# Altium PCB PLIS_EPM240T100C5N.PcbDoc
Units mm, origin at the board's own origin, x right, y up, seen from the top; angles counter-clockwise.
Board outline 58.18 x 48.08 mm, 2 copper layers (Top Layer, Bottom Layer); 21 components, 85 nets, 242 pads, 56 vias.
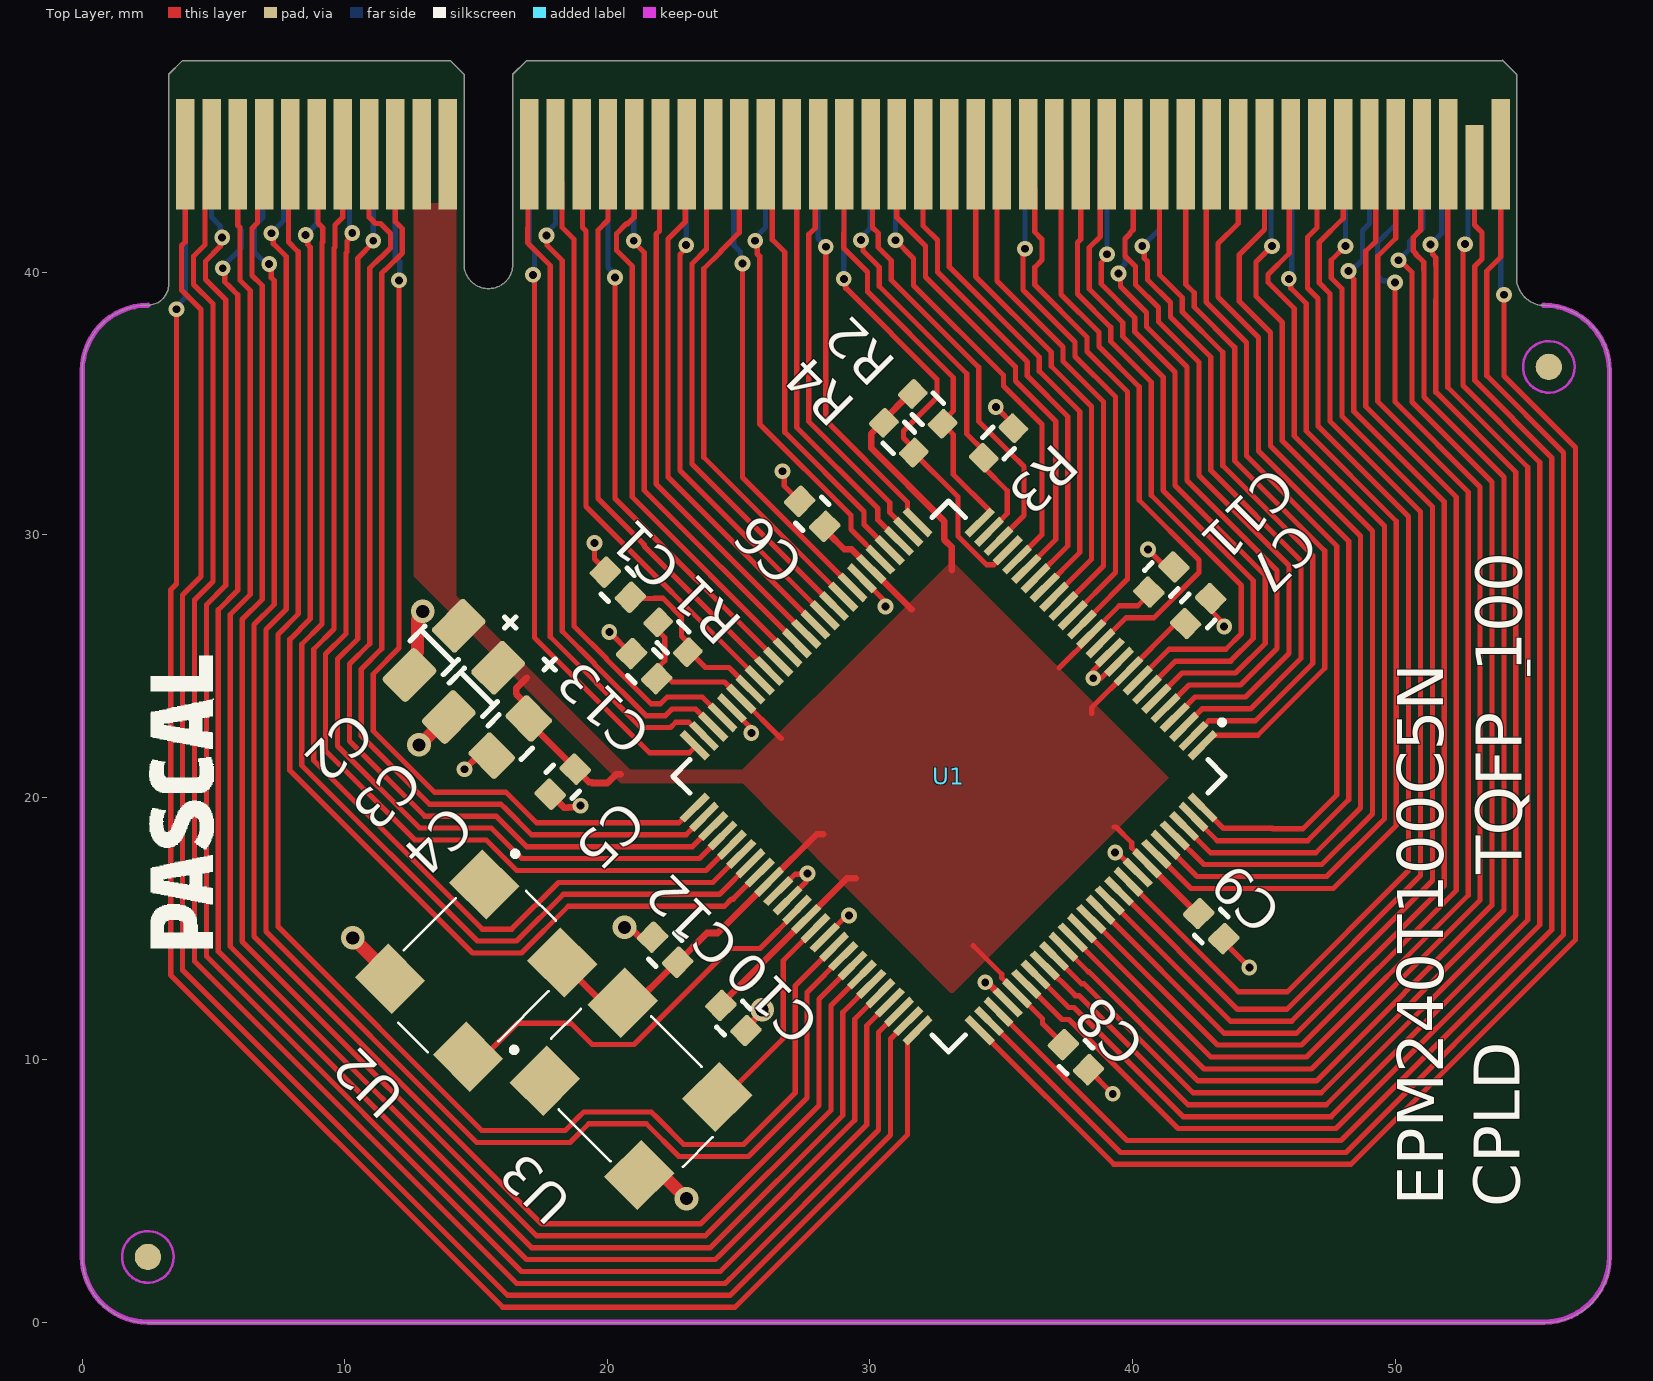
[diagram p0: Top Layer view]
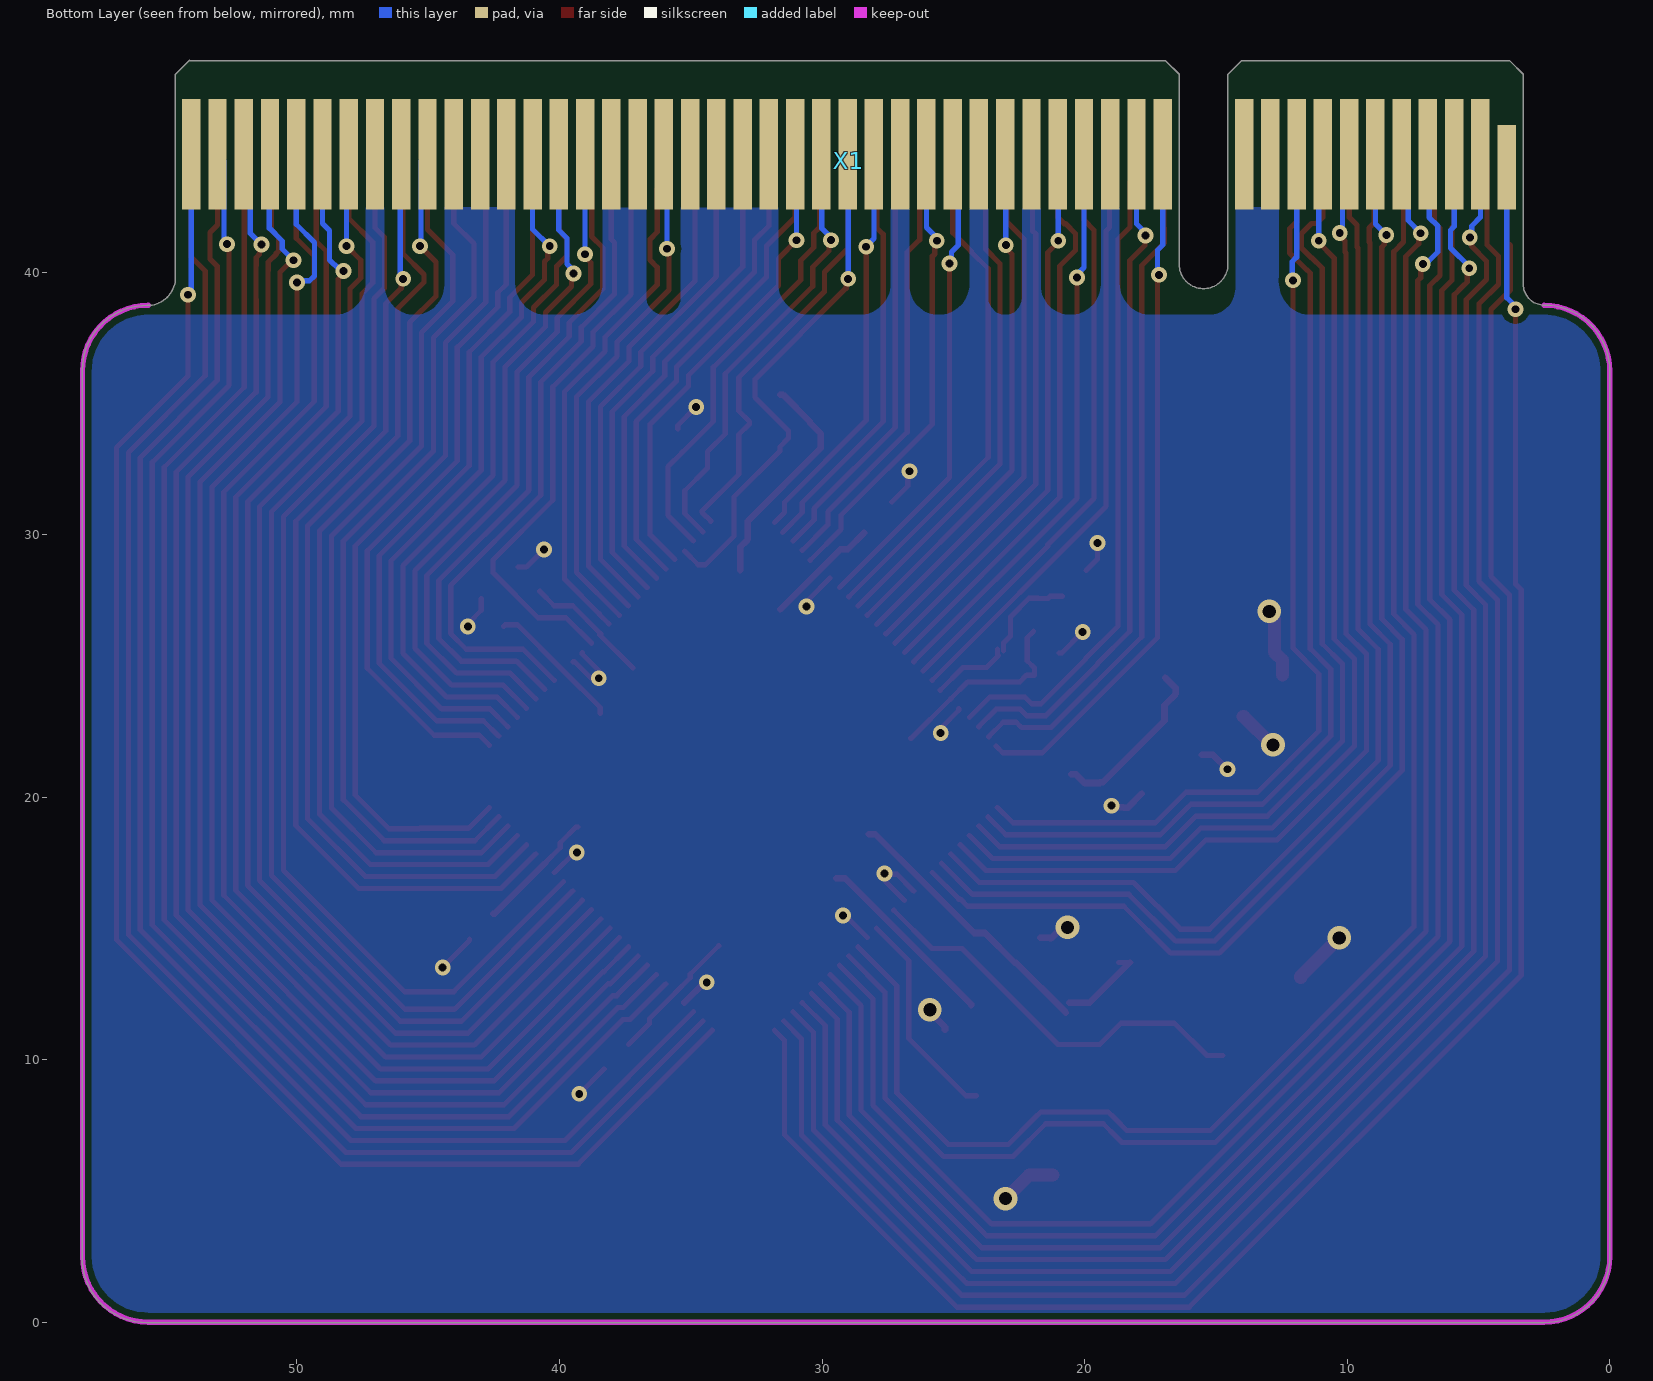
[diagram p1: Bottom Layer view, seen from below]
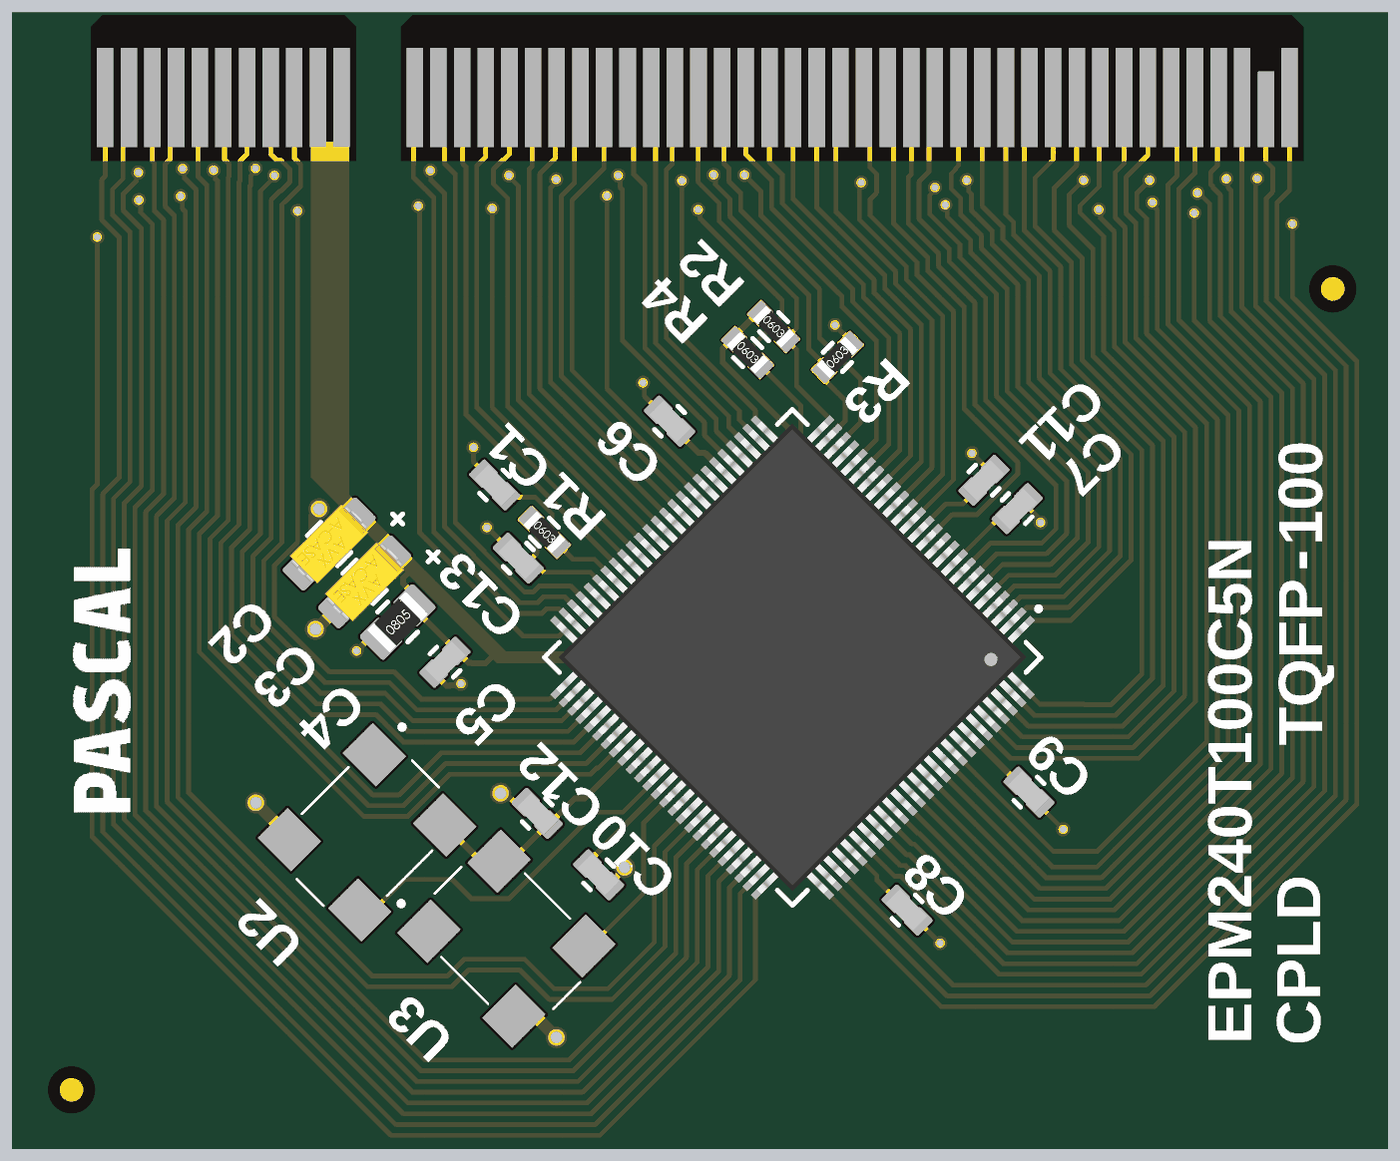
[diagram p2: 3D render of the assembled board from above, using the file's embedded part models]

## Layer stack, top to bottom
Top Solder: solder mask 0.0102, Solder Resist, Dk 3.5
Top Layer: signal copper 0.0356
Dielectric 1: dielectric 0.32, FR-4, Dk 4.8
Bottom Layer: signal copper 0.0356
Bottom Solder: solder mask 0.0102, Solder Resist, Dk 3.5

## Board outline
58.174,2.591 58.174,36.288 ccw(c55.713,36.274) 55.699,38.735 cw(c55.7,39.809) 54.625,39.809 54.625,40.05 54.625,47.542 54.092,48.075 54.067,48.05 16.906,48.05 16.398,47.542 16.398,40.303 cw(c15.471,40.303) 14.544,40.303 14.544,47.542 14.036,48.05 3.8,48.05 3.292,47.542 3.292,39.542 cw(c2.5,39.542) 2.5,38.75 ccw(c2.5,36.25) 0,36.25 0,2.5 ccw(c2.5,2.5) 2.5,0 55.728,0 ccw(c55.728,2.449) 58.176,2.449

## Design rules (kind name [scope] priority, off if disabled: settings)
BoardOutlineClearance [All] p1: gap=0.25 ignorepadtopadclearanceinfootprint=FALSE
Clearance Clearance_1 [All] p1: gap=0.254 ignorepadtopadclearanceinfootprint=FALSE except(0: Arc-Hole Track-Hole SMDPad-Hole THPad-Hole Via-Hole Fill-Hole Poly-Hole Region-Hole Text-Hole)
Clearance [All] p2: gap=0.2 ignorepadtopadclearanceinfootprint=FALSE
ComponentClearance [All] p1 off: gap=0.254 collisioncheckmode=3 verticalgap=0.254 showdistances=FALSE
Height [All] p1 off: minheight=0 maxheight=25.4 prefheight=12.7
PolygonConnect [All] p1: connectstyle=Direct reliefconductorwidth=0.254 reliefentries=4 polygonreliefangle="90 Angle" airgapwidth=0.254
RoutingVias [All] p1: holewidth=0.5 width=0.9 viastyle="Through Hole" minholewidth=0.3 minwidth=0.6 maxholewidth=0.711 maxwidth=1.27
SolderMaskExpansion [All] p1: expansion=-0.8 istentingtop=FALSE soldermaskfromhole=TRUE
Width [All] p1: maxlimit=0.5 minlimit=0.2 preferedwidth=0.25 minimp=50.000000 maximp=50.000000 favimp=50.000000
28 further rules are at their usual default settings.

## Classes and differential pairs
component class EPM240T100C5N_2: X1

## Components (designator, comment, footprint, x,y, rotation, side; value= is the part's Value field where it differs from the comment)
C1 "0603" K10-79_1.6_0.8(0603) 20.4,28.1 r315 top value=104
C2 "A-case" K53-68_3216(A) 13.4,25.6 r225 top value="100 мк"
C3 "A-case" K53-68_3216(A) 14.9,24 r225 top value="10 мк"
C4 "0603" K10-79_2.0_1.25(0805) 16.3,22.3 r45 top value="1 мк"
C5 "0603" K10-79_1.6_0.8(0603) 18.3,20.6 r45 top value="0,1 мк"
C6 "0603" K10-79_1.6_0.8(0603) 27.8,30.8 r315 top value="0,01 мк"
C7 "0603" K10-79_1.6_0.8(0603) 42.5,27.1 r225 top value="0,01 мк"
C8 "0603" K10-79_1.6_0.8(0603) 37.846,10.109 r135 top value="0,01 мк"
C9 "0603" K10-79_1.6_0.8(0603) 43,15.1 r135 top value="0,01 мк"
C10 "0603" K10-79_1.6_0.8(0603) 24.8,11.6 r135 top value="0,01 мк"
C11 "0603" K10-79_1.6_0.8(0603) 41.1,28.3 r225 top value="0,01 мк"
C12 "0603" K10-79_1.6_0.8(0603) 22.2,14.2 r315 top value="0,01 мк"
C13 "0603" K10-79_1.6_0.8(0603) 21.4,25 r315 top value="0,01 мк"
R1 "10 кОм ±* *, *" "RES 0603" 22.5,26.1 r315 top value="10 к"
R2 "10 кОм ±* *, *" "RES 0603" 32.2,34.8 r315 top value="10 к"
R3 "10 кОм ±* *, *" "RES 0603" 34.9,33.5 r45 top value="10 к"
R4 "10 кОм ±* *, *" "RES 0603" 31.1,33.7 r315 top value="10 к"
U1 "EPM240T100C5N" 100-TQFP_ALR 33,20.8 r225 top
U2 "генератор" CB3LV3C50M0000 15,13.4 r225 top value="32.768 кГц"
U3 "генератор" CB3LV3C50M0000 20.9,8.9 r315 top value="50 МГц"
X1 "KONT_POLE_MEZ" 3113-112t_otv 30.025,44 r180 bottom

## Footprints (in the part's own frame and the unit in brackets; to place one, negate y for a bottom-side part, rotate by r counter-clockwise, add the part's x,y. Pads: shape width x height; smd on the part's side, far side on the other; paste and mask are expansions set on the pad)
100-TQFP_ALR [mil]
  rect 53.5x11 smd paste+0 mask+0: 1(-302.25,236.22) 2(-302.25,216.54) 3(-302.25,196.85) 4(-302.25,177.17) 5(-302.25,157.48) 6(-302.25,137.8) 7(-302.25,118.11) 8(-302.25,98.43) 9(-302.25,78.74) 10(-302.25,59.06) 11(-302.25,39.37) 12(-302.25,19.69) 13(-302.25,0) 14(-302.25,-19.69) 15(-302.25,-39.37) 16(-302.25,-59.06) 17(-302.25,-78.74) 18(-302.25,-98.43) 19(-302.25,-118.11) 20(-302.25,-137.8) 21(-302.25,-157.48) 22(-302.25,-177.17) 23(-302.25,-196.85) 24(-302.25,-216.54) 25(-302.25,-236.22) 51(302.25,-236.22) 52(302.25,-216.54) 53(302.25,-196.85) 54(302.25,-177.17) 55(302.25,-157.48) 56(302.25,-137.8) 57(302.25,-118.11) 58(302.25,-98.43) 59(302.25,-78.74) 60(302.25,-59.06) 61(302.25,-39.37) 62(302.25,-19.69) 63(302.25,0) 64(302.25,19.69) 65(302.25,39.37) 66(302.25,59.06) 67(302.25,78.74) 68(302.25,98.43) 69(302.25,118.11) 70(302.25,137.8) 71(302.25,157.48) 72(302.25,177.17) 73(302.25,196.85) 74(302.25,216.54) 75(302.25,236.22)
  rect 11x53.5 smd paste+0 mask+0: 26(-236.22,-302.25) 27(-216.54,-302.25) 28(-196.85,-302.25) 29(-177.17,-302.25) 30(-157.48,-302.25) 31(-137.8,-302.25) 32(-118.11,-302.25) 33(-98.43,-302.25) 34(-78.74,-302.25) 35(-59.06,-302.25) 36(-39.37,-302.25) 37(-19.69,-302.25) 38(0,-302.25) 39(19.69,-302.25) 40(39.37,-302.25) 41(59.06,-302.25) 42(78.74,-302.25) 43(98.43,-302.25) 44(118.11,-302.25) 45(137.8,-302.25) 46(157.48,-302.25) 47(177.17,-302.25) 48(196.85,-302.25) 49(216.54,-302.25) 50(236.22,-302.25) 76(236.22,302.25) 77(216.54,302.25) 78(196.85,302.25) 79(177.17,302.25) 80(157.48,302.25) 81(137.8,302.25) 82(118.11,302.25) 83(98.43,302.25) 84(78.74,302.25) 85(59.06,302.25) 86(39.37,302.25) 87(19.69,302.25) 88(0,302.25) 89(-19.69,302.25) 90(-39.37,302.25) 91(-59.06,302.25) 92(-78.74,302.25) 93(-98.43,302.25) 94(-118.11,302.25) 95(-137.8,302.25) 96(-157.48,302.25) 97(-177.17,302.25) 98(-196.85,302.25) 99(-216.54,302.25) 100(-236.22,302.25)
  body extent -315,-315 315,315, height 47
3113-112t_otv [mm]
  rect 0.7x3.2 smd: A1(26.1,0)
  rect 0.7x4.2 smd: A2(25.1,0.5) A3(24.1,0.5) A4(23.1,0.5) A5(22.1,0.5) A6(21.1,0.5) A7(20.1,0.5) A8(19.1,0.5) A9(18.1,0.5) A10(17.1,0.5) A11(16.1,0.5) A12(13,0.5) A13(12,0.5) A14(11,0.5) A15(10,0.5) A16(9,0.5) A17(8,0.5) A18(7,0.5) A19(6,0.5) A20(5,0.5) A21(4,0.5) A22(3,0.5) A23(2,0.5) A24(1,0.5) A25(0,0.5) A26(-1,0.5) A27(-2,0.5) A28(-3,0.5) A29(-4,0.5) A30(-5,0.5) A31(-6,0.5) A32(-7,0.5) A33(-8,0.5) A34(-9,0.5) A35(-10,0.5) A36(-11,0.5) A37(-12,0.5) A38(-13,0.5) A39(-14,0.5) A40(-15,0.5) A41(-16,0.5) A42(-17,0.5) A43(-18,0.5) A44(-19,0.5) A45(-20,0.5) A46(-21,0.5) A47(-22,0.5) A48(-23,0.5) A49(-24,0.5)
  rect 0.7x4.2 smd far side: B1(26.1,0.5) B2(25.1,0.5) B3(24.1,0.5) B4(23.1,0.5) B5(22.1,0.5) B6(21.1,0.5) B7(20.1,0.5) B8(19.1,0.5) B9(18.1,0.5) B10(17.1,0.5) B11(16.1,0.5) B12(13,0.5) B13(12,0.5) B14(11,0.5) B15(10,0.5) B16(9,0.5) B17(8,0.5) B18(7,0.5) B19(6,0.5) B20(5,0.5) B21(4,0.5) B22(3,0.5) B23(2,0.5) B24(1,0.5) B25(0,0.5) B26(-1,0.5) B27(-2,0.5) B28(-3,0.5) B29(-4,0.5) B30(-5,0.5) B31(-6,0.5) B32(-7,0.5) B33(-8,0.5) B34(-9,0.5) B35(-10,0.5) B36(-11,0.5) B37(-12,0.5) B38(-13,0.5) B39(-14,0.5) B40(-15,0.5) B41(-16,0.5) B42(-17,0.5) B43(-18,0.5) B44(-19,0.5) B45(-20,0.5) B46(-21,0.5) B47(-22,0.5) B49(-24,0.5)
  rect 0.7x3.2 smd far side: B48(-23,0)
CB3LV3C50M0000 [mm]
  rect 1.8x2 smd mask+0.102: 1(-2.54,-2.1) 2(2.54,-2.1) 3(2.54,2.1) 4(-2.54,2.1)
  silkscreen extent -4.3,-2.5 3.5,2.5
K10-79_1.6_0.8(0603) [mm]
  rrect20% 0.85x0.95 smd mask+0.1: 1(-0.675,0) 2(0.675,0)
  silkscreen extent -0.2,-0.7 0.2,0.7, body extent -0.8,-0.42 0.84,0.43, height 0.41
K10-79_2.0_1.25(0805) [mm]
  rrect20% 1.2x1.45 smd mask+0.1: 1(-1,0) 2(1,0)
  silkscreen extent -0.3,-0.9 0.3,0.9, body extent -1.15,-0.67 1.15,0.68, height 0.76
K53-68_3216(A) [mm] "Molded Capacitor, 2-Leads, Body 3,20x1,60mm, IPC Medium Density"
  rrect20% 1.75x1.3 smd mask+0.1: 1(-1.325,0) 2(1.325,0)
  silkscreen extent -3.1,-0.9 0.4,1.6, body extent -1.7,-0.84 1.7,0.84, height 1.71
"RES 0603" [mm]
  rrect20% 0.8x0.9 smd paste-0.025 mask+0.05: 1(-0.8,0) 2(0.8,0)
  silkscreen extent -0.28,-0.57 0.28,0.57, body extent -0.85,-0.4 0.85,0.4, height 0.56

## Part data
C1 C4 C5 C6 C7 C8 C9 C10 C11 C12 C13: library part C, Package=0603
C2 C3: library part C+, Package=A-case
R1 R2 R3 R4: library part R_1
U2 U3: Package=0705, PartNumber=MQ-12.000-18, Company=Mercury
X1: library part 3113-112T

## Free pads (board coordinates)
  round 1 smd paste-1 mask+0.5: 1(2.5,2.5) 1(55.855,36.398)

## Via types
v1: diameter 0.6, hole 0.3, Top Layer to Bottom Layer, 50 vias
v2: diameter 0.9, hole 0.5, Top Layer to Bottom Layer, 6 vias

## Nets (pads, with @x,y where several pads share a name; then routed paths per layer and width w, separated by ;. In a path a pad name is that pad's centre, name@x,y a point inside that pad or via, vN(x,y) a via of type N, cw(c..) or ccw(c..) an arc to the next point about the centre after c; other vN are vias at no path point)
3V3: C2.1 C3.1 C4.2 C5.2 C6.2 C7.2 C8.2 C9.2 C10.2 C11.2 C12.2 C13.2 R1.1 R2.1 R4.1 U1.9 U1.13 U1.31 U1.45 U1.59 U1.63 U1.80 U1.94 U2.4 U3.4 X1.B10 X1.B11 | length 68.1
  Top Layer w0.2: U2.4@18.242,13.708 18.284,13.708 U2.4@18.708,13.708 ; R1.1@21.95,26.325 22.184,26.091 22.184,25.207 21.904,24.927 21.904,24.655 22.215,24.655 22.471,24.4 24.459,24.4 25.101,23.758 26.61,22.249 26.624,22.249 ; 33.934,14.351 35.02,13.265 35.02,13.132 35.6,12.552 U1.80 36.572,11.571 36.572,11.383 C8.2 ; 37.2,24.925 U1.13@38.466,26.191 ; U1.13 39.498,27.298 40.198,27.298 C11.2@40.748,27.848 ; 38.45,23.2 38.45,23.422 U1.9 41.607,26.579 42.067,26.579 C7.2@42.123,26.523 ; 39.3,18.875 39.371,18.875 39.97,18.275 39.97,18.081 40.55,17.502 U1.94
  Top Layer w0.25: 16.925,24.55 16.523,24.148 16.523,23.941 16.957,23.507 16.957,22.918 18.775,21.1 19.3,20.575 19.4,20.575 19.425,20.55 20,20.55 20.325,20.875 20.5,20.875 ; U2.4 18.284,13.708 19.811,12.181 U3.4 ; U3.4@20.711,11.806 22.601,13.696 C12.2@22.651,13.696 ; C12.2@22.651,13.697 C12.2 23.79,14.835 24.207,14.835 U1.59 27.972,18.6 28.225,18.6 ; C10.2 24.323,12.123 27.19,14.99 U1.63 29.125,16.925 29.45,16.925 ; C6.2@28.402,30.073 29.024,29.451 29.298,29.451 U1.31 31.591,27.159 ; R2.1@31.584,35.341 31.491,35.341 30.475,34.325 30.475,34.284 30.048,33.857 30.048,33.302 32.825,30.525 32.825,29.825 33.113,29.538 33.113,28.65 ; U1.94 42.465,15.577 C9.2
G_TCK: R3.1 U1.24 X1.A25 | length 17.1
  Top Layer w0.2: v1(29.661,41.224) 29.737,41.148 29.737,40.82 30.356,40.202 30.356,39.468 33.688,36.137 33.688,33.844 34.359,33.172 34.359,32.55 35.232,31.677 35.232,30.81 U1.24
  Bottom Layer w0.2: v1(29.661,41.224) 29.661,41.326 30.016,41.682 30.016,44.491 X1.A25
G_TDI: U1.23 X1.B25 | length 16.4
  Top Layer w0.2: X1.B25@30.1,43.35 30.1,41.71 30.315,41.495 30.315,40.948 30.81,40.453 30.81,39.712 34.142,36.38 34.142,36.287 34.142,34.565 34.144,34.563 34.144,34.321 35.321,33.144 35.868,32.598 35.868,30.739 U1.23
G_TDO: R2.2 U1.25 X1.B24 | length 16.8
  Top Layer w0.2: X1.B24 29.013,44.488 29.013,41.501 29.007,41.495 29.007,40.953 29.013,40.947 29.013,40.903 29.902,40.014 29.902,39.262 33.172,35.992 33.172,34.723 32.766,34.316 32.766,34.223 33.172,33.817 33.172,32.304 34.568,30.909 34.568,30.854 U1.25@34.236,30.522
G_TMS: R4.2 U1.22 X1.A24 | length 20
  Top Layer w0.2: v1(29.007,39.751) 29.083,39.674 29.083,39.395 32.556,35.922 32.556,35.234 31.275,33.953 31.275,33.687 31.606,33.355 31.606,33.194 33.35,31.45 33.35,29.947 34.437,28.86 34.715,28.86 U1.22@35.24,29.386
  Bottom Layer w0.2: v1(29.007,39.751) 29.007,44.482 X1.A24
GND: C1.1 C2.2 C3.2 C4.1 C5.1 C6.1 C7.1 C8.1 C9.1 C10.1 C11.1 C12.1 C13.1 R3.2 U1.10 U1.11 U1.32 U1.46 U1.60 U1.61 U1.65 U1.79 U1.93 U2.2 U3.2 X1.A10 X1.A11 X1.A14 X1.A17 X1.A19 X1.A22 X1.A27 X1.A28 X1.A29 X1.A30 X1.A32 X1.A33 X1.A37 X1.A38 X1.A39 X1.A42 | length 35.2
  Top Layer w0.2: v1(19.507,29.693) 19.507,29.082 C1.1@19.944,28.645 ; v1(20.075,26.3) 20.873,25.502 C13.1@20.973,25.502 ; U1.46@24.793,23.375 24.793,23.319 25.405,22.707 25.405,22.528 v1(25.482,22.452) ; U1.60 27.151,17.072 v1@27.562,17.072 ; v1(26.674,32.424) 26.738,32.36 26.738,31.862 C6.1@27.345,31.255 ; U1.61 27.551,16.765 27.551,17.026 v1(27.625,17.1) ; U1.65 29.114,15.5 v1(29.2,15.5) ; U1.32 30.523,27.519 30.523,27.342 v1(30.595,27.27) ; v1(34.796,34.867) 35.498,34.164 R3.2@35.498,34.036 ; C8.1@38.298,9.657 v1(39.246,8.709) ; U1.11 39.136,25.465 38.506,24.836 v1(38.506,24.536) 38.802,24.536 39.433,25.168 U1.10 ; v1(39.34,17.906) 39.421,17.906 40.187,17.139 U1.93 ; v1(40.592,29.439) 41.254,28.777 C11.1 ; C7.1 42.977,27.13 43.491,26.617 v1(43.491,26.509) ; C9.1@43.427,14.598 43.427,14.548 v1(44.45,13.525)
  Top Layer w0.25: v1(14.563,21.074) 15.107,21.618 C4.1@15.543,21.618 ; C5.1@17.82,20.145 18.366,19.6 18.502,19.6 18.522,19.62 18.908,19.62 v1(18.975,19.687) ; v2(20.65,15.051) 20.775,14.927 20.978,14.927 21.263,14.642 21.312,14.642 21.321,14.65 C12.1@21.697,14.65 ; C10.1@25.318,11.156 25.318,11.251 25.893,11.826 v2(25.893,11.913) ; v1(34.391,12.956) 34.48,12.956 U1.79
  Top Layer w0.5: v2(10.3,14.65) 11.769,13.181 U2.2@11.769,13.139 ; C2.2 12.463,25.229 12.771,25.536 12.771,26.777 12.971,26.977 v2(12.971,27.085) ; v2(12.825,22) 12.862,22 13.937,23.075 C3.2@13.975,23.075 ; U3.2 22.112,5.619 v2(23.012,4.719)
NetC1_2: C1.2 R1.2 U1.44 | length 6.8
  Top Layer w0.2: C1.2@20.848,27.666 21.306,27.666 21.393,27.579 21.77,27.579 21.775,27.584 22.115,27.584 22.827,26.872 22.827,26.145 23.091,25.882 R1.2@23.091,25.584 ; R1.2@23.276,25.405 23.731,24.95 24.632,24.95 U1.44@25.5,24.082 ; R1.2@23.316,25.359 R1.2@23.316,25.657
NetU1_62: U1.62 U2.3 | length 15.5
  Top Layer w0.2: U2.3@14.739,10.169 15.344,10.169 16.575,11.4 18.61,11.4 19.423,10.587 21.013,10.587 24.676,14.25 25.818,14.25 U1.62@27.268,15.7
NetU1_64: U1.64 U3.3 | length 8.2
  Top Layer w0.2: U3.3@24.131,8.639 24.514,8.639 26.697,10.822 26.697,13.79 U1.64
PIN_1: U1.1 X1.B37 | length 27.6
  Top Layer w0.2: X1.B37 42.025,39.546 42.351,39.219 42.351,38.68 43.891,37.14 43.891,32.823 47.323,29.39 47.323,24.922 44.769,22.368 43.053,22.368 U1.1
PIN_2: U1.2 X1.B36 | length 27.5
  Top Layer w0.2: X1.B36 41.025,39.904 41.897,39.031 41.897,38.492 43.437,36.952 43.437,32.635 46.869,29.202 46.869,26.445 46.869,25.719 46.869,25.415 46.869,25.11 44.678,22.919 44.374,22.919 44.069,22.919 43.344,22.919 42.906,22.919 42.327,22.339 U1.2
PIN_3: U1.3 X1.A36 | length 27.5
  Top Layer w0.2: v1(40.371,40.996) 40.448,40.919 40.448,40.537 40.571,40.413 40.571,39.716 41.443,38.843 41.443,38.304 42.983,36.764 42.983,32.447 46.415,29.014 46.415,26.633 46.415,25.908 46.415,25.603 46.415,25.298 44.49,23.373 44.186,23.373 43.881,23.373 43.156,23.373 42.653,23.373 41.973,22.693 U1.3
  Bottom Layer w0.2: v1@40.383,40.996 41.025,41.638 X1.A36
PIN_4: U1.4 X1.B35 | length 27.1
  Top Layer w0.2: X1.B35 40.025,41.624 39.908,41.507 39.908,41.457 39.717,41.266 39.717,40.625 40.117,40.225 40.117,39.527 40.989,38.655 40.989,38.115 42.529,36.576 42.529,32.259 45.961,28.826 45.961,26.821 45.961,26.096 45.961,25.791 45.961,25.486 44.302,23.827 43.998,23.827 43.693,23.827 42.968,23.827 42.382,23.827 41.611,23.055 U1.4
PIN_5: U1.5 X1.A35 | length 26.8
  Top Layer w0.2: v1(39.463,39.954) 39.54,39.878 39.54,39.463 40.535,38.467 40.535,37.927 42.075,36.388 42.075,32.071 45.507,28.638 45.507,27.009 45.507,26.284 45.507,25.979 45.507,25.674 44.114,24.281 43.81,24.281 43.505,24.281 42.78,24.281 42.147,24.281 41.266,23.4 U1.5
  Bottom Layer w0.2: v1(39.463,39.954) 39.463,40.062 39.717,40.316 39.717,41.297 40.03,41.611 40.03,44.495 X1.A35
PIN_6: U1.6 X1.A34 | length 26.3
  Top Layer w0.2: v1(39.026,40.688) 39.026,40.58 38.809,40.363 38.809,39.551 40.081,38.279 40.081,37.739 41.621,36.2 41.621,31.883 45.053,28.45 45.053,27.197 45.053,26.472 45.053,26.167 45.053,25.862 43.926,24.735 43.621,24.735 43.317,24.735 42.592,24.735 41.885,24.735 U1.6
  Bottom Layer w0.2: X1.A34 39.026,44.499 v1(39.026,40.688)
PIN_7: U1.7 X1.B34 | length 26.2
  Top Layer w0.2: X1.B34 38.775,44.25 38.775,41.362 38.355,40.942 38.355,39.363 39.627,38.091 39.627,37.551 41.167,36.012 41.167,31.695 44.599,28.262 44.599,27.385 44.599,26.66 44.599,26.355 44.599,26.05 43.738,25.189 43.433,25.189 43.129,25.189 42.404,25.189 41.641,25.189 40.559,24.107 U1.7
PIN_8: U1.8 X1.B33 | length 25.6
  Top Layer w0.2: X1.B33 38.025,41.254 37.901,41.13 37.901,39.175 39.173,37.903 39.173,37.363 40.713,35.824 40.713,31.506 44.145,28.074 44.145,26.238 43.55,25.643 41.388,25.643 40.205,24.461 U1.8
PIN_12: U1.12 X1.B32 | length 23.1
  Top Layer w0.2: X1.B32 37.275,44.25 37.275,39.159 38.719,37.715 38.719,37.175 40.259,35.636 40.259,31.318 42.532,29.045 42.532,28.56 40.816,26.844 39.751,26.844 U1.12
PIN_14: U1.14 X1.B31 | length 19.2
  Top Layer w0.2: X1.B31@36.125,43.325 36.275,43.175 36.275,41.536 36.557,41.254 36.557,40.469 36.281,40.193 36.281,39.511 38.265,37.527 38.265,36.987 39.805,35.448 39.805,28.312 38.485,26.992 38.485,26.973 U1.14@38.125,26.613
PIN_15: U1.15 X1.A31 | length 19.8
  Top Layer w0.2: v1(35.903,40.894) 35.827,40.818 35.827,39.323 37.811,37.339 37.811,36.799 39.351,35.26 39.351,28.565 U1.15
  Bottom Layer w0.2: v1(35.903,40.894) 35.903,44.378 X1.A31
PIN_16: U1.16 X1.B30 | length 19.6
  Top Layer w0.2: X1.B30 34.843,44.318 34.843,39.665 37.357,37.151 37.357,36.611 38.897,35.072 38.897,28.818 U1.16
PIN_17: U1.17 X1.B29 | length 18.2
  Top Layer w0.2: X1.B29@34.025,43.447 34.025,39.841 36.903,36.963 36.903,36.423 38.443,34.884 38.443,29.071 U1.17
PIN_18: U1.18 X1.B28 | length 17.8
  Top Layer w0.2: X1.B28@33.025,43.175 33.025,40.199 36.449,36.775 36.449,36.235 37.989,34.696 37.989,29.324 U1.18
PIN_19: U1.19 X1.B27 | length 18
  Top Layer w0.2: X1.B27@32.025,43.6 32.025,41.771 32.571,41.225 32.571,40.011 35.995,36.586 35.995,36.047 37.535,34.508 37.535,29.577 U1.19
PIN_20: U1.20 X1.B26 | length 17.2
  Top Layer w0.2: X1.B26@31.025,42.893 31.025,42.088 32.117,40.996 32.117,39.823 35.541,36.398 35.541,35.859 37.081,34.319 37.081,29.831 U1.20
PIN_21: U1.21 X1.A26 | length 18.2
  Top Layer w0.2: v1(30.969,41.219) 31.663,40.525 31.663,39.501 35.087,36.076 35.087,35.671 36.551,34.208 36.551,30.007 U1.21
  Bottom Layer w0.2: v1(30.969,41.219) 30.969,44.444 X1.A26
PIN_26: U1.26 X1.A23 | length 15.6
  Top Layer w0.2: v1(28.321,40.97) 28.321,34.352 31.432,31.24 31.432,30.853 U1.26
  Bottom Layer w0.2: X1.A23 28.025,41.287 28.321,40.991 v1(28.321,40.97)
PIN_27: U1.27 X1.B23 | length 15.5
  Top Layer w0.2: X1.B23@28.092,43.79 27.915,43.612 27.915,41.692 27.667,41.444 27.667,34.321 30.754,31.234 30.754,30.849 U1.27@31.511,30.093
PIN_28: U1.28 X1.B22 | length 16.4
  Top Layer w0.2: X1.B22 27.213,44.312 27.213,34.094 30.3,31.007 30.3,30.571 U1.28
PIN_29: U1.29 X1.B21 | length 17
  Top Layer w0.2: X1.B21 26.275,44.25 26.275,41.874 26.283,41.867 26.283,41.241 26.759,40.765 26.759,33.906 29.775,30.89 29.775,30.389 U1.29
PIN_30: U1.30 X1.A21 | length 17.6
  Top Layer w0.2: v1(25.629,41.199) 25.705,41.122 25.705,40.701 25.8,40.606 25.8,34.223 29.275,30.748 29.275,30.207 U1.30@30.45,29.032
  Bottom Layer w0.2: v1(25.629,41.199) 25.629,41.307 26.025,41.703 X1.A21
PIN_33: U1.33 X1.A20 | length 18.5
  Top Layer w0.2: v1(25.146,40.335) 25.146,32.19 U1.33
  Bottom Layer w0.2: X1.A20 24.816,44.291 24.816,41.021 25.069,40.767 25.069,40.412 v1(25.146,40.335)
PIN_34: U1.34 X1.B20 | length 19.6
  Top Layer w0.2: X1.B20 25.025,41.509 24.321,40.805 24.321,40.784 23.673,40.136 23.673,32.956 U1.34
PIN_35: U1.35 X1.B19 | length 19.3
  Top Layer w0.2: X1.B19@24.121,43.962 23.775,43.616 23.775,40.881 23.219,40.324 23.219,32.703 U1.35
PIN_36: U1.36 X1.A18 | length 20
  Top Layer w0.2: v1(23.001,41.032) 23.001,40.924 22.765,40.687 22.765,32.449 U1.36
  Bottom Layer w0.2: v1(23.001,41.032) 23.001,44.476 X1.A18
PIN_37: U1.37 X1.B18 | length 20.5
  Top Layer w0.2: X1.B18 22.962,44.437 22.962,41.917 22.311,41.266 22.311,32.196 U1.37
PIN_38: U1.38 X1.B17 | length 20.7
  Top Layer w0.2: X1.B17 21.981,44.456 21.981,41.578 21.857,41.454 21.857,31.943 U1.38
PIN_39: U1.39 X1.A16 | length 21.2
  Top Layer w0.2: v1(21.006,41.199) 21.006,41.144 21.403,40.747 21.403,31.69 U1.39
  Bottom Layer w0.2: v1(21.006,41.199) 21.006,44.481 X1.A16
PIN_40: U1.40 X1.B16 | length 22.4
  Top Layer w0.2: X1.B16@21.025,44.92 21.025,42.1 20.778,41.853 20.735,41.853 20.352,41.47 20.352,40.837 20.949,40.24 20.949,31.437 U1.40
PIN_41: U1.41 X1.A15 | length 22
  Top Layer w0.2: v1(20.295,39.802) 20.295,31.384 U1.41
  Bottom Layer w0.2: X1.A15 20.025,40.18 20.295,39.91 v1(20.295,39.802)
PIN_42: U1.42 X1.B15 | length 22.5
  Top Layer w0.2: X1.B15 20.025,41.988 19.641,41.603 19.641,31.389 21.4,29.63 21.4,29.572 U1.42
PIN_43: U1.43 X1.B14 | length 21.6
  Top Layer w0.2: X1.B14@19.05,43.287 19.05,41.704 19.187,41.567 19.187,31.078 U1.43
PIN_47: U1.47 X1.B13 | length 24.5
  Top Layer w0.2: X1.B13@18.2,43.5 18.275,43.425 18.275,41.717 18.733,41.259 18.733,26.519 19.968,25.284 19.968,25.26 21.66,23.568 22.024,23.568 22.278,23.822 23.614,23.822 U1.47@24.383,23.053
PIN_48: U1.48 X1.A13 | length 26
  Top Layer w0.2: v1(17.679,41.402) 17.698,41.383 17.698,41.028 18.279,40.447 18.279,26.331 19.514,25.096 19.514,25.072 21.472,23.114 22.212,23.114 22.466,23.368 23.361,23.368 U1.48
  Bottom Layer w0.2: v1(17.679,41.402) 17.679,41.501 18.025,41.847 X1.A13
PIN_49: U1.49 X1.B12 | length 25
  Top Layer w0.2: X1.B12@16.975,43.147 16.975,41.681 16.967,41.673 16.967,41.116 17.825,40.259 17.825,26.119 21.284,22.66 22.4,22.66 22.606,22.865 23.101,22.865 U1.49@23.651,22.314
PIN_50: U1.50 X1.A12 | length 26.6
  Top Layer w0.2: v1(17.171,39.903) 17.221,39.853 17.221,26.08 21.601,21.7 23.118,21.7 U1.50@23.379,21.961
  Bottom Layer w0.2: X1.A12 17.025,41.035 17.221,40.839 17.221,39.954 v1(17.171,39.903)
PIN_51: U1.51 X1.A9 | length 36.4
  Top Layer w0.2: v1(12.068,39.693) 12.068,25.688 11.085,24.704 11.085,22.528 13.418,20.194 16.139,20.194 17.301,19.033 22.732,19.033 23.313,19.614 U1.51
  Bottom Layer w0.2: X1.A9 11.925,40.577 12.094,40.408 12.094,39.719 v1(12.068,39.693)
PIN_52: U1.52 X1.B9 | length 37.8
  Top Layer w0.2: X1.B9 11.925,41.924 12.191,41.658 12.191,40.74 11.542,40.091 11.522,40.091 11.405,39.974 11.405,25.667 10.631,24.893 10.631,22.34 13.23,19.74 15.951,19.74 16.136,19.556 17.113,18.579 23.001,18.579 U1.52
PIN_53: U1.53 X1.B8 | length 39.3
  Top Layer w0.2: X1.B8 10.925,42.1 11.172,41.853 11.354,41.853 11.737,41.47 11.737,40.929 11.354,40.545 11.334,40.545 10.951,40.162 10.951,25.855 10.177,25.081 10.177,22.152 13.042,19.286 15.763,19.286 16.925,18.125 23.245,18.125 24.027,18.907 U1.53
PIN_54: U1.54 X1.A8 | length 40
  Top Layer w0.2: v1(11.083,41.199) 11.083,41.134 10.497,40.547 10.497,26.043 9.723,25.269 9.723,21.964 12.854,18.832 15.575,18.832 16.737,17.671 23.507,17.671 U1.54
  Bottom Layer w0.2: X1.A8 11.083,44.342 v1(11.083,41.199)
PIN_55: U1.55 X1.A7 | length 41.1
  Top Layer w0.2: v1(10.283,41.499) 10.283,41.391 10.08,41.188 10.08,40.773 10.043,40.735 10.043,26.231 9.269,25.457 9.269,21.776 12.666,18.378 15.387,18.378 16.549,17.217 23.76,17.217 U1.55
  Bottom Layer w0.2: X1.A7 10.175,44.25 10.175,41.715 10.283,41.607 v1(10.283,41.499)
PIN_56: U1.56 X1.B7 | length 43.7
  Top Layer w0.2: X1.B7 9.925,42.1 9.626,41.801 9.626,40.961 9.589,40.923 9.589,26.419 8.815,25.645 8.815,21.404 15.235,14.983 16.354,14.983 18.134,16.763 24.013,16.763 U1.56
PIN_57: U1.57 X1.B6 | length 43.9
  Top Layer w0.2: X1.B6@8.975,43.647 8.975,41.879 9.163,41.691 9.163,41.149 9.135,41.121 9.135,26.607 8.361,25.833 8.361,21.216 15.047,14.529 16.542,14.529 18.322,16.309 24.266,16.309 U1.57
PIN_58: U1.58 X1.A6 | length 46.1
  Top Layer w0.2: v1(8.509,41.42) 8.586,41.344 8.586,41.061 8.681,40.966 8.681,26.795 7.907,26.021 7.907,21.028 14.859,14.075 16.73,14.075 18.51,15.855 24.454,15.855 24.724,16.125 24.789,16.125 U1.58
  Bottom Layer w0.2: v1(8.509,41.42) 8.511,41.42 8.925,41.835 X1.A6
PIN_66: U1.66 X1.B5 | length 60.6
  Top Layer w0.2: X1.B5 7.855,44.43 7.855,41.149 8.227,40.778 8.227,26.983 7.453,26.209 7.453,15.077 15.215,7.315 18.394,7.315 18.85,7.771 19.102,8.023 21.669,8.023 21.921,7.771 22.91,6.782 25.19,6.782 27.151,8.743 27.151,12.821 28.632,14.302 U1.66
PIN_67: U1.67 X1.A5 | length 62.1
  Top Layer w0.2: v1(7.201,41.485) 7.278,41.409 7.278,41.085 7.773,40.59 7.773,27.171 6.999,26.397 6.999,15.394 6.999,14.889 15.027,6.861 15.531,6.861 18.582,6.861 18.781,7.06 19.29,7.569 21.481,7.569 22.722,6.328 25.378,6.328 27.605,8.555 27.605,12.577 U1.67
  Bottom Layer w0.2: v1(7.201,41.485) 7.201,41.495 7.675,41.969 7.675,44.25 X1.A5
PIN_68: U1.68 X1.A4 | length 64.4
  Top Layer w0.2: v1(7.119,40.319) 7.195,40.242 7.195,39.796 7.315,39.676 7.315,27.356 6.545,26.585 6.545,14.701 17.487,3.759 23.546,3.759 28.059,8.272 28.059,12.323 U1.68
  Bottom Layer w0.2: X1.A4 6.878,44.453 6.878,42.087 6.547,41.756 6.547,40.782 7.01,40.319 v1(7.119,40.319)
PIN_69: U1.69 X1.B4 | length 65.4
  Top Layer w0.2: X1.B4 6.675,44.25 6.675,41.884 6.465,41.674 6.465,39.884 6.855,39.494 6.855,27.537 6.091,26.773 6.091,14.513 17.298,3.305 23.734,3.305 23.889,3.461 28.513,8.084 28.513,12.07 U1.69
PIN_70: U1.70 X1.B3 | length 66.3
  Top Layer w0.2: X1.B3 5.925,41.793 6.004,41.714 6.004,40.066 6.011,40.06 6.011,39.696 6.401,39.306 6.401,27.725 5.637,26.961 5.637,14.325 17.11,2.851 23.922,2.851 24.077,3.007 28.967,7.896 28.967,11.817 U1.70
PIN_71: U1.71 X1.A3 | length 67.8
  Top Layer w0.2: v1(5.349,40.155) 5.426,40.079 5.426,39.635 5.606,39.455 5.918,39.143 5.918,27.885 5.183,27.149 5.183,14.137 16.922,2.397 24.11,2.397 24.265,2.553 29.421,7.708 29.421,11.555 30.4,12.534 U1.71
  Bottom Layer w0.2: v1(5.349,40.155) 5.349,40.214 6.065,40.93 6.065,41.602 5.925,41.742 X1.A3
PIN_72: U1.72 X1.A2 | length 69.1
  Top Layer w0.2: v1(5.329,41.324) 5.252,41.247 5.252,40.983 4.691,40.421 4.691,39.728 5.461,38.958 5.461,28.07 4.729,27.337 4.729,13.949 16.734,1.943 24.298,1.943 24.453,2.099 29.875,7.52 29.875,11.302 30.753,12.181 U1.72
  Bottom Layer w0.2: X1.A2 4.925,42.1 5.258,41.767 5.258,41.395 v1(5.329,41.324)
PIN_73: U1.73 X1.B2 | length 70
  Top Layer w0.2: X1.B2 4.675,44.25 4.675,41.048 4.237,40.609 4.237,39.54 4.975,38.802 4.975,28.226 4.275,27.525 4.275,13.761 16.546,1.489 24.486,1.489 24.641,1.645 30.329,7.332 30.329,11.058 U1.73
PIN_74: U1.74 X1.B1 | length 71
  Top Layer w0.2: X1.B1 3.925,41.162 3.783,41.019 3.783,39.408 3.783,39.325 4.521,38.587 4.521,28.414 3.821,27.713 3.821,13.421 16.207,1.035 24.674,1.035 30.783,7.144 30.783,10.805 U1.74
PIN_75: U1.75 X1.A1 | length 71.2
  Top Layer w0.2: v1(3.591,38.592) 3.591,28.126 3.367,27.901 3.367,13.233 16.019,0.581 24.862,0.581 31.432,7.151 31.432,10.747 U1.75
  Bottom Layer w0.2: v1(3.591,38.592) 3.591,38.7 3.925,39.034 X1.A1
PIN_76: U1.76 X1.A49 | length 59.4
  Top Layer w0.2: U1.76 39.289,6.026 48.317,6.026 56.871,14.58 56.871,33.326 54.144,36.052 54.144,37.653 54.146,37.655 v1(54.146,39.145)
  Bottom Layer w0.2: X1.A49@54.026,44.499 54.026,39.374 54.146,39.253 v1(54.146,39.145)
PIN_77: U1.77 X1.B49 | length 58.5
  Top Layer w0.2: U1.77 39.542,6.48 48.129,6.48 56.417,14.768 56.417,33.138 53.492,36.062 53.492,40.046 54.025,40.579 X1.B49
PIN_78: U1.78 X1.B48 | length 56.9
  Top Layer w0.2: U1.78 39.795,6.934 47.941,6.934 55.963,14.956 55.963,32.95 53.038,35.874 53.038,40.234 53.313,40.509 53.313,41.512 53.025,41.8 X1.B48
PIN_81: U1.81 X1.A48 | length 55.8
  Top Layer w0.2: U1.81 35.963,12.897 37.317,11.542 37.586,11.542 41.739,7.388 47.753,7.388 55.509,15.144 55.509,32.762 52.584,35.686 52.584,40.997 v1(52.659,41.072)
  Bottom Layer w0.2: v1(52.659,41.072) 52.659,41.18 52.775,41.296 52.775,44.25 X1.A48
PIN_82: U1.82 X1.B47 | length 54.5
  Top Layer w0.2: U1.82 36.316,13.25 37.571,11.996 37.774,11.996 41.927,7.842 47.565,7.842 55.055,15.332 55.055,32.574 52.007,35.622 52.007,38.771 52.009,38.773 52.009,40.432 52.005,40.436 52.005,44.48 X1.B47
PIN_83: U1.83 X1.A47 | length 53.7
  Top Layer w0.2: U1.83 36.67,13.604 37.824,12.45 37.962,12.45 42.115,8.296 47.377,8.296 54.601,15.52 54.601,32.386 51.553,35.434 51.553,38.959 51.555,38.961 51.555,40.255 51.551,40.259 51.551,40.567 51.427,40.691 51.427,40.978 v1(51.351,41.055)
  Bottom Layer w0.2: v1(51.351,41.055) 51.775,41.479 51.775,44.25 X1.A47
PIN_84: U1.84 X1.B46 | length 52.5
  Top Layer w0.2: U1.84 37.014,13.948 38.059,12.904 38.15,12.904 42.304,8.75 47.189,8.75 54.147,15.708 54.147,32.198 51.099,35.246 51.099,39.147 51.101,39.149 51.101,40.067 51.095,40.072 51.095,40.381 50.783,40.693 50.783,40.73 50.694,40.819 50.694,41.324 50.975,41.605 50.975,44.45 X1.B46
PIN_85: U1.85 X1.A46 | length 51.7
  Top Layer w0.2: U1.85 37.368,14.302 38.312,13.358 38.338,13.358 42.492,9.204 47.001,9.204 53.693,15.896 53.693,32.01 50.645,35.058 50.645,39.335 50.647,39.337 50.647,39.999 50.186,40.459 v1(50.129,40.459)
  Bottom Layer w0.2: v1(50.129,40.459) 50.557,40.887 50.557,41.187 51.05,41.68 51.05,44.475 X1.A46
PIN_86: U1.86 X1.A45 | length 50.8
  Top Layer w0.2: U1.86 42.728,9.658 46.813,9.658 53.239,16.084 53.239,31.822 49.993,35.067 v1(49.993,39.608)
  Bottom Layer w0.2: v1(49.993,39.608) 49.924,39.677 49.519,39.677 49.333,39.863 49.333,41.136 50.025,41.828 X1.A45
PIN_87: U1.87 X1.B45 | length 49.2
  Top Layer w0.2: U1.87 42.981,10.112 46.625,10.112 52.785,16.272 52.785,31.634 49.339,35.079 49.339,40.612 50.025,41.298 X1.B45
PIN_88: U1.88 X1.B44 | length 48.1
  Top Layer w0.2: U1.88 43.234,10.566 46.437,10.566 52.331,16.46 52.331,31.446 48.885,34.891 48.885,40.8 49.263,41.178 49.263,44.262 X1.B44
PIN_89: U1.89 X1.A44 | length 47.1
  Top Layer w0.2: U1.89 43.487,11.02 46.249,11.02 51.877,16.648 51.877,31.258 48.431,34.703 48.431,39.735 48.224,39.942 v1(48.224,40.05)
  Bottom Layer w0.2: v1(48.224,40.05) 48.332,40.05 48.575,40.293 48.582,40.293 48.762,40.473 48.762,41.59 49.025,41.854 X1.A44
PIN_90: U1.90 X1.A43 | length 45.9
  Top Layer w0.2: U1.90 39.136,16.07 43.731,11.474 46.061,11.474 51.423,16.836 51.423,31.069 47.977,34.515 47.977,39.372 47.57,39.779 47.57,40.458 v1(48.108,40.996)
  Bottom Layer w0.2: X1.A43@48.031,44.494 48.108,44.417 v1(48.108,40.996)
PIN_91: U1.91 X1.B43 | length 44.9
  Top Layer w0.2: U1.91 39.498,16.432 44.002,11.928 45.873,11.928 50.969,17.024 50.969,30.881 47.523,34.327 47.523,39.184 47.116,39.591 47.116,41.147 48.025,42.056 X1.B43
PIN_92: U1.92 X1.B42 | length 43.4
  Top Layer w0.2: U1.92 44.03,12.598 45.901,12.598 50.515,17.212 50.515,30.693 47.069,34.139 47.069,38.996 46.662,39.403 46.662,41.335 47.025,41.698 X1.B42
PIN_95: U1.95 X1.A41 | length 38
  Top Layer w0.2: U1.95 40.912,17.846 42.226,16.532 47.647,16.532 50.047,18.932 50.047,30.519 46.615,33.951 46.615,38.808 46.031,39.392 46.031,39.674 v1(45.955,39.751)
  Bottom Layer w0.2: v1(45.955,39.751) 45.955,39.859 46.069,39.974 46.069,44.456 X1.A41
PIN_96: U1.96 X1.B41 | length 37.3
  Top Layer w0.2: U1.96 41.257,18.191 42.461,16.986 47.393,16.986 49.593,19.186 49.593,30.331 46.161,33.763 46.161,38.62 45.161,39.62 45.161,39.918 45.968,40.725 45.968,44.443 X1.B41
PIN_97: U1.97 X1.A40 | length 36.1
  Top Layer w0.2: U1.97 42.723,17.44 47.205,17.44 49.139,19.374 49.139,30.143 45.707,33.575 45.707,38.088 44.707,39.087 44.707,40.389 v1(45.314,40.996)
  Bottom Layer w0.2: X1.A40 45.275,44.25 45.275,41.034 v1(45.314,40.996)
PIN_98: U1.98 X1.B40 | length 35.1
  Top Layer w0.2: U1.98 42.977,17.894 46.979,17.894 48.685,19.601 48.685,29.955 45.253,33.387 45.253,37.704 44.069,38.888 44.069,40.676 45.025,41.632 X1.B40
PIN_99: U1.99 X1.B39 | length 33.9
  Top Layer w0.2: U1.99 43.23,18.348 46.669,18.348 48.231,19.91 48.231,29.767 44.799,33.199 44.799,37.516 43.259,39.056 43.259,41.097 44.025,41.863 X1.B39
PIN_100: U1.100 X1.B38 | length 32.5
  Top Layer w0.2: U1.100 43.464,18.821 45.327,18.821 45.346,18.802 46.481,18.802 47.777,20.098 47.777,29.578 44.345,33.011 44.345,37.328 42.805,38.868 42.805,44.28 X1.B38
pads on no net: U2.1 U3.1

## Polygon pours and split planes (outlines as drawn)
3V3 on Top Layer "3V3_L01_P000" (solid, pour order 0): 24.899,20.799 33.113,29.012 41.375,20.75 33.114,12.489
3V3 on Top Layer "3V3_L01_P001" (solid, pour order 1): 12.624,42.625 14.249,42.625 14.249,27.676 20.868,21.057 26.137,21.057 26.137,20.549 20.501,20.549 12.624,28.426
GND on Bottom Layer (solid, remove dead copper, pour order 12): 0,0 58.928,0 58.928,38.375 48.575,38.375 cw(c48.575,39.575) 47.375,39.575 47.375,42.45 46.675,42.45 46.675,39.525 cw(c45.525,39.525) 45.525,38.375 cw(c45.525,39.525) 44.375,39.525 44.375,42.475 41.7,42.475 41.7,39.575 cw(c40.5,39.575) 40.5,38.375 39.55,38.375 cw(c39.55,39.575) 38.35,39.575 38.35,42.45 36.7,42.45 36.7,39.05 cw(c36.025,39.05) 36.025,38.375 cw(c36.025,39.025) 35.375,39.025 35.375,42.45 31.675,42.45 31.675,39.575 cw(c30.475,39.575) 30.475,38.375 28.575,38.375 cw(c28.575,39.575) 27.375,39.575 27.375,42.425 26.675,42.425 26.675,39.485 cw(c25.565,39.485) 25.565,38.375 cw(c25.565,39.565) 24.375,39.565 24.375,42.425 23.675,42.425 23.675,39.025 cw(c23.025,39.025) 23.025,38.375 cw(c23.025,39.025) 22.375,39.025 22.375,42.425 21.675,42.425 21.675,39.497 cw(c20.553,39.497) 20.553,38.375 cw(c20.553,39.553) 19.375,39.553 19.375,42.45 18.675,42.45 18.675,39.575 cw(c17.475,39.575) 17.475,38.375 15.25,38.375 cw(c15.25,39.375) 14.25,39.375 14.25,42.475 12.6,42.475 12.6,39.575 cw(c11.4,39.575) 11.4,38.375 0,38.375

## Keep-outs
Top Layer:
  circle w0.1: c2.5,2.5 r0.983
  circle w0.1: c55.855,36.398 r0.983
Keep-Out Layer:
  lines w0.2: 2.5,38.746 ccw(c2.5,36.246) 0,36.246 0,2.515 ccw(c2.5,2.515) 2.5,0.015 55.666,0.015 ccw(c55.666,2.515) 58.166,2.515 58.166,36.246 ccw(c55.666,36.246) 55.666,38.746

## Silkscreen, mask and mechanical layers (free items; w line width, h text height)
Top Overlay:
  drawing of 15 lines, arcs and shapes, not listed
  text "-" at 53.932,25.355 h3 r270
  text "TQFP  100" at 55.398,17.08 h3 r90
  text "EPM240T100C5N" at 52.415,4.445 h3 r90
  text "CPLD" at 55.321,4.394 h3 r90
Mechanical 4 (Mech5):
  lines w0.1: 2.489,38.735 ccw(c2.489,39.535) 3.289,39.535 3.289,47.464 3.325,47.5 ; 2.5,38.735 ccw(c2.5,36.235) 0,36.235 0,2.515 ccw(c2.5,2.515) 2.5,0.015 55.662,0.015 ccw(c55.662,2.515) 58.162,2.515 58.162,36.246 ccw(c55.662,36.246) 55.662,38.746 ; 54.625,39.548 ccw(c55.425,39.548) 55.425,38.748 55.675,38.748

## Text inside footprints (layer, text, board x,y; h text height)
U1: Mechanical 2 "*" at 41.874,21.733 h1.27 r225